# Altium PCB ContadorSincronico_PCB.PcbDoc
Units mm, origin at the board's own origin, x right, y up, seen from the top; angles counter-clockwise.
Board outline 72.01 x 36.47 mm, 2 copper layers (Top Layer, Bottom Layer); 18 components, 11 nets, 74 pads, 11 vias.
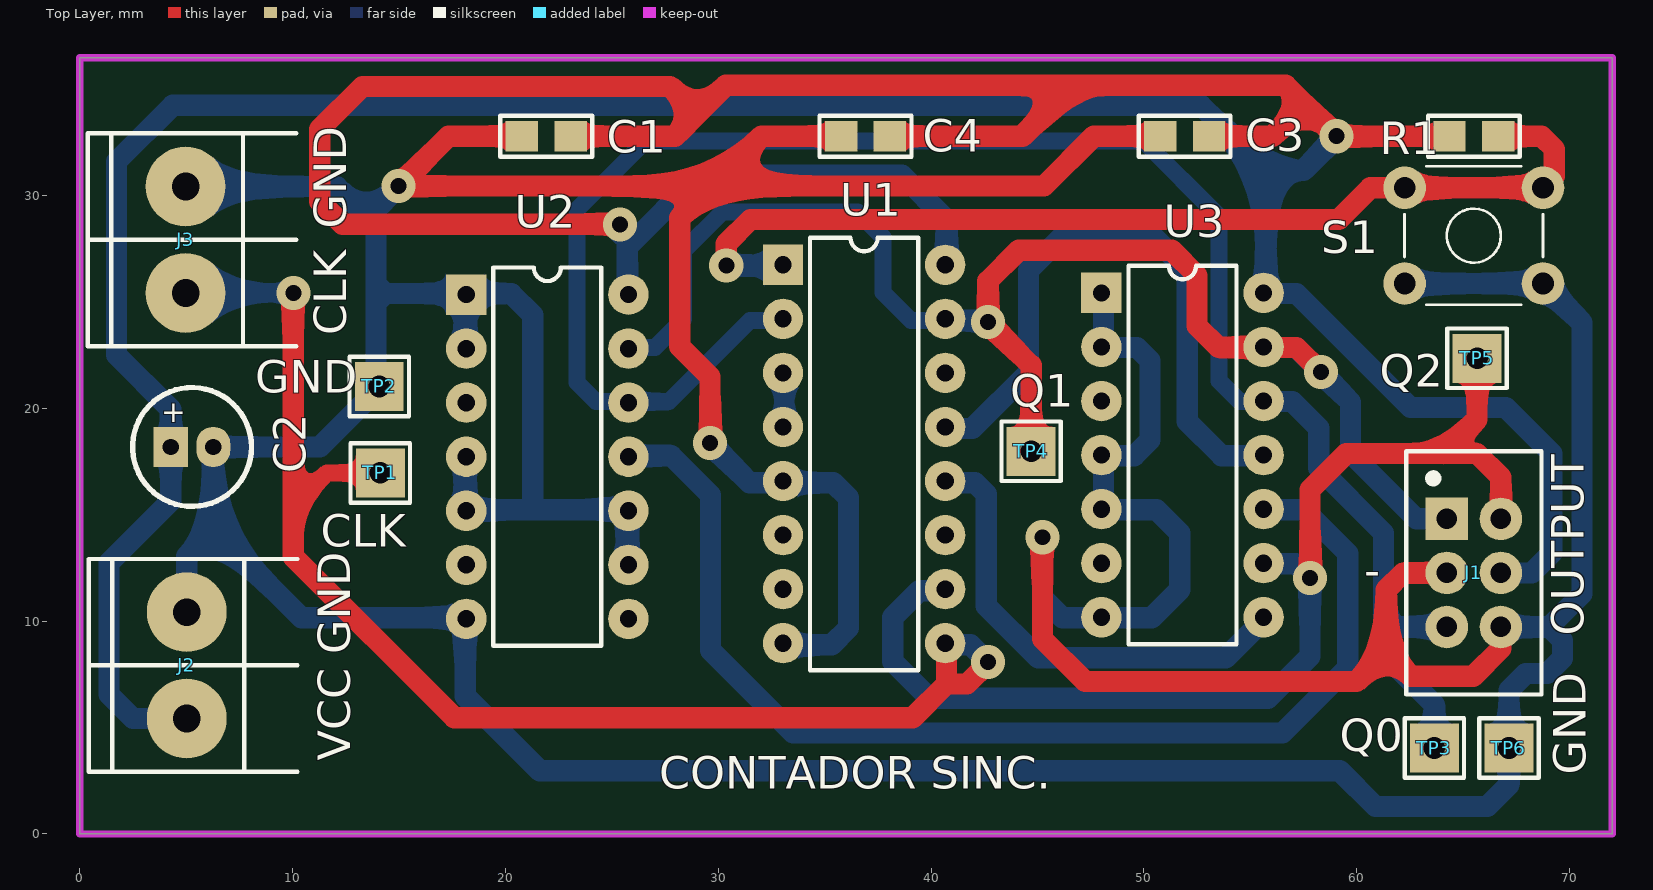
[diagram p0: Top Layer view]
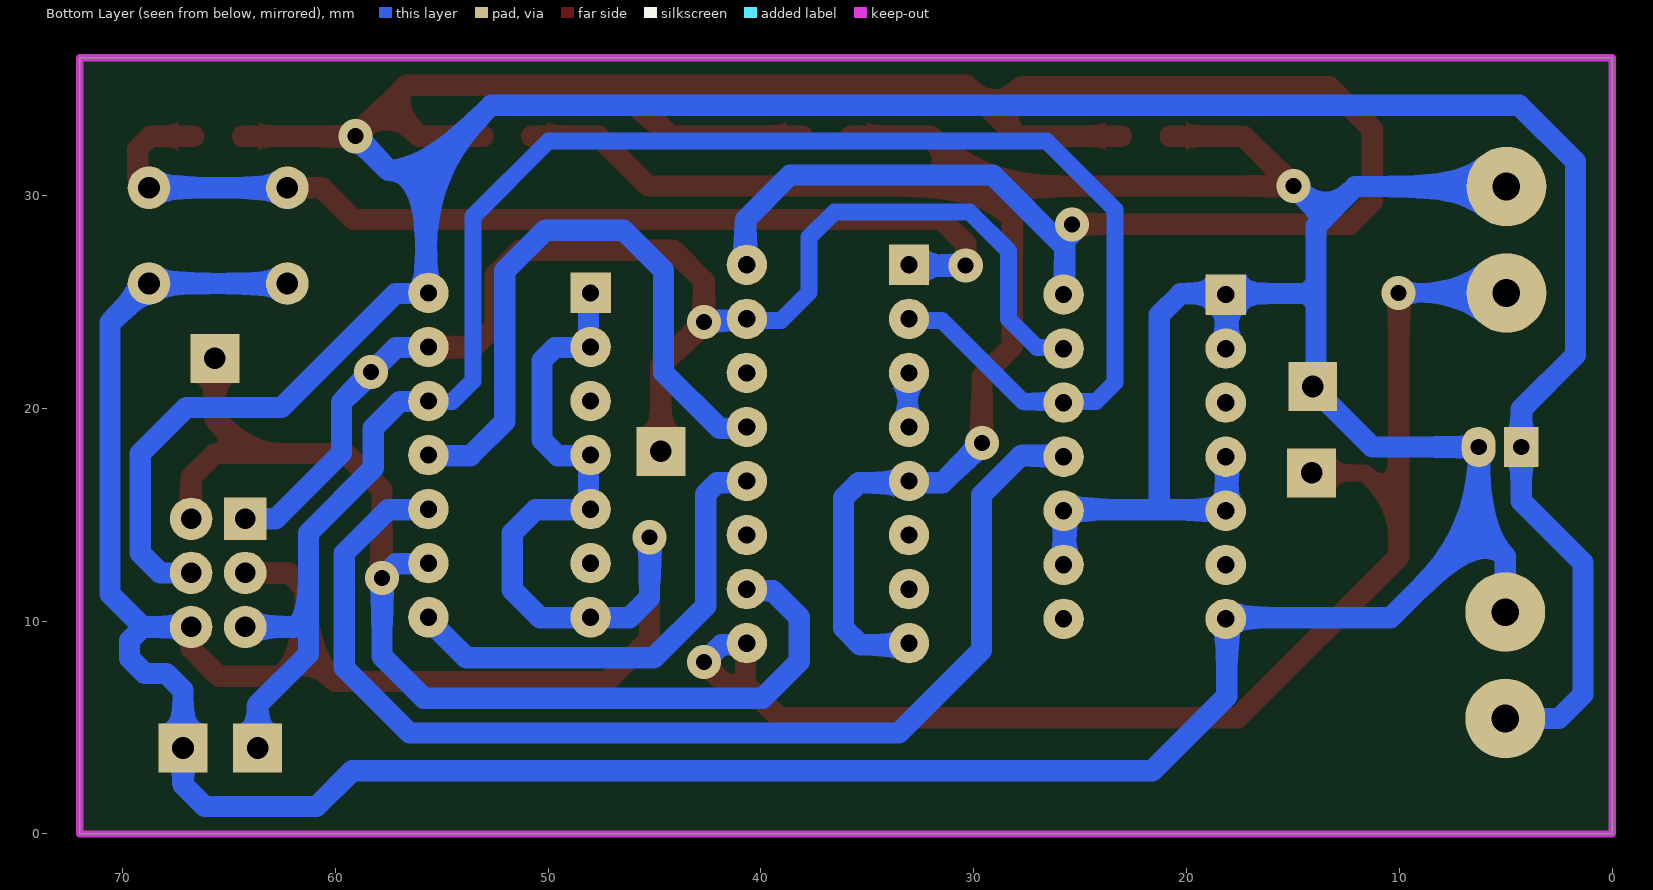
[diagram p1: Bottom Layer view, seen from below]
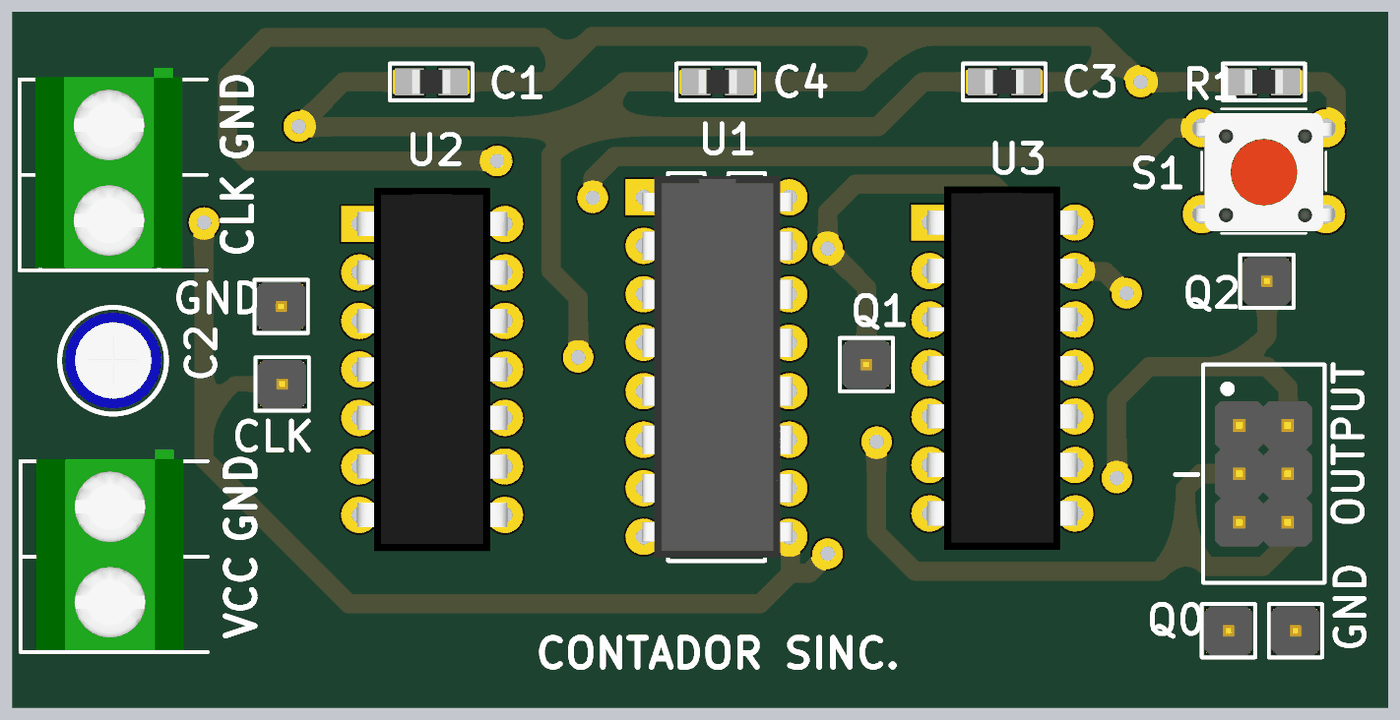
[diagram p2: 3D render of the assembled board from above, using the file's embedded part models]

## Layer stack, top to bottom
Top Solder: solder mask 0.0102, Solder Resist, Dk 3.5
Top Layer: signal copper 0.0356
Dielectric 1: dielectric 0.32, FR-4, Dk 4.8
Bottom Layer: signal copper 0.0356
Bottom Solder: solder mask 0.0102, Solder Resist, Dk 3.5

## Board outline
0,0 72.009,0 72.009,36.474 0,36.474

## Design rules (kind name [scope] priority, off if disabled: settings)
Clearance [All] p1: gap=0.4
PolygonConnect [All] p1: connectstyle=Relief reliefconductorwidth=0.254 reliefentries=4 polygonreliefangle="90 Angle" airgapwidth=0.254
RoutingVias [All] p1: holewidth=0.75 width=1.5 viastyle="Through Hole" minholewidth=0.75 minwidth=1.5 maxholewidth=0.75 maxwidth=1.5
SolderMaskExpansion [All] p1: expansion=0.102
Width PowerSupply [InNetClass('Power')] p1: maxlimit=2 minlimit=0.8 preferedwidth=1
Width [All] p2: maxlimit=1 minlimit=0.7 preferedwidth=0.8
30 further rules are at their usual default settings.

## Classes and differential pairs
net class Power: GND VCC

## Components (designator, comment, footprint, x,y, rotation, side; value= is the part's Value field where it differs from the comment)
C1 "100nF" 0805 21.92,32.791 r180 top
C2 "10uF" CAP100RP 5.274,18.186 r0 top
C3 "100nF" 0805 51.918,32.791 r180 top
C4 "100nF" 0805 36.919,32.791 r180 top
J1 "OUTPUT" SIP3*2 64.237,14.808 r270 top
J2 "SUPPLY" BORNERA2 5.025,7.925 r0 top
J3 "CLOCK" BORNERA2 4.974,27.925 r0 top
R1 "100k" 0805 65.507,32.789 r0 top
S1 "RESET" TACTSWITCH 65.507,28.118 r270 top
TP1 "CLK" TPTH 14.122,16.967 r270 top
TP2 "GND" TPTH 14.072,21.031 r270 top
TP3 "Q0" TPTH 63.652,4.039 r270 top
TP4 "Q1" TPTH 44.704,17.983 r270 top
TP5 "Q2" TPTH 65.659,22.352 r270 top
TP6 "GND" TPTH 67.158,4.039 r270 top
U1 "SN74LS175N" DIP16 33.045,26.746 r0 top
U2 "SN74LS08N" DIP14 18.161,25.349 r0 top
U3 "SN74LS86AN" DIP14 48.006,25.425 r0 top

## Footprints (in the part's own frame and the unit in brackets; to place one, negate y for a bottom-side part, rotate by r counter-clockwise, add the part's x,y. Pads: shape width x height; smd on the part's side, far side on the other; paste and mask are expansions set on the pad)
0805 [mil] "Pasivo 0805"
  rect 60x56 smd: 1(-45,0) 2(45,0)
  silkscreen extent -85,-38 85,38, body extent -40,-25 39,25, height 15
BORNERA2 [mm] "Bornera con Tornillos 5mm separación"
  round 3.75 hole 1.3: 1(0,2.5) 2(0,-2.5)
  silkscreen extent -4.6,-5 5.2,5, body extent -3.76,-4.89 3.94,5.61, height 10
CAP100RP [mm] "Body diameter 5mm"
  rect 1.6x1.9 hole 0.762: 1(-1,0)
  oval 1.6x1.9 hole 0.762: 2(1,0)
  silkscreen extent -2.79,-2.79 2.79,2.79, body extent -2.53,-2.51 2.53,2.54, height 11.53
DIP14 [mm]
  rect 1.9x1.9 hole 0.813: 1(0,0)
  round 1.9 hole 0.813: 2(0,-2.54) 3(0,-5.08) 4(0,-7.62) 5(0,-10.16) 6(0,-12.7) 7(0,-15.24) 8(7.62,-15.24) 9(7.62,-12.7) 10(7.62,-10.16) 11(7.62,-7.62) 12(7.62,-5.08) 13(7.62,-2.54) 14(7.62,0)
  silkscreen extent 1.27,-16.51 6.35,1.27, body extent -0.13,-17.14 7.75,1.9, height 4.19
DIP16 [mm]
  rect 1.9x1.9 hole 0.813: 1(0,0)
  round 1.9 hole 0.813: 2(0,-2.54) 3(0,-5.08) 4(0,-7.62) 5(0,-10.16) 6(0,-12.7) 7(0,-15.24) 8(0,-17.78) 9(7.62,-17.78) 10(7.62,-15.24) 11(7.62,-12.7) 12(7.62,-10.16) 13(7.62,-7.62) 14(7.62,-5.08) 15(7.62,-2.54) 16(7.62,0)
  silkscreen extent 1.27,-19.05 6.35,1.27, body extent -0.08,-18.89 7.79,1.11, height 1.98
SIP3*2 [mm]
  rect 2x2 / inner rect 1.524x1.524 / far side rect 2x2 hole 0.965: 1(0,0)
  round 2 / inner round 1.524 / far side round 2 hole 0.965: 2(0,2.54) 3(2.54,0) 4(2.54,2.54) 5(5.08,0) 6(5.08,2.54)
  silkscreen extent -3.18,-1.91 8.25,4.45, body extent -1.26,-1.3 6.36,3.78, height 10.1
TACTSWITCH [mm]
  round 2 hole 1.016: 1(-2.25,-3.25) 2(-2.25,3.25) 3(2.25,-3.25) 4(2.25,3.25)
  silkscreen extent -3.25,-3.25 3.25,3.25, body extent -3.05,-3.95 3.15,3.95, height 7
TPTH [mm]
  rect 2.3x2.3 hole 1.016: 1(0,0)
  silkscreen extent -1.4,-1.4 1.4,1.4, body extent -1.27,-1.27 1.27,1.27, height 6.04

## Part data
C1 C3 C4: library part CAP
C2: library part CAPPOL
J1: library part CON3*2
J2 J3: library part "BORNERA 2"
R1: library part RES
S1: library part "TACT SWITCH"
TP1 TP2 TP3 TP4 TP5 TP6: library part TP
U1: "Quadruple D-Type Flip-Flop with Clear"
U2: "Quadruple 2-Input Positive-AND Gate"
U3: "Quadruple 2-Input Exclusive-OR Gate"

## Via types
v1: diameter 1.6, hole 0.75, Top Layer to Bottom Layer, 11 vias

## Nets (pads, with @x,y where several pads share a name; then routed paths per layer and width w, separated by ;. In a path a pad name is that pad's centre, name@x,y a point inside that pad or via, vN(x,y) a via of type N, cw(c..) or ccw(c..) an arc to the next point about the centre after c; other vN are vias at no path point)
CLK: J3.2 TP1.1 U1.9 | length 63.2
  Top Layer w0.8: 10.033,15.392 11.608,16.967 TP1.1
  Top Layer w1: v1(10.033,25.425) 10.033,15.392 10.033,13.03 17.602,5.461 39.141,5.461 40.729,7.048 ; U1.9@40.729,8.89 40.729,7.048 ; v1(42.672,8.077) 42.672,8.026 41.694,7.048 40.729,7.048
  Bottom Layer w0.8: J3.2 v1(10.033,25.425)
  Bottom Layer w1: U1.9@40.729,8.89 41.859,8.89 v1(42.672,8.077)
GND: C1.2 C2.2 C3.2 C4.2 J1.3 J1.6 J2.1 J3.1 S1.3 S1.4 TP2.1 TP6.1 U1.5 U1.8 U2.1 U2.2 U2.4 U2.5 U2.7 U2.9 U2.10 U3.1 U3.2 U3.4 U3.5 U3.7 | length 321.4
  Top Layer w1: C1.2 17.323,32.791 v1(14.986,30.455) 29.693,30.455 ; v1(29.616,18.364) 29.616,21.488 28.194,22.911 28.194,28.956 29.693,30.455 ; C4.2 32.029,32.791 29.693,30.455 ; v1(45.237,13.945) 45.237,9.169 47.244,7.163 59.995,7.163 61.392,8.56 ; C3.2 47.65,32.791 45.314,30.455 29.693,30.455 ; J1.3 62.179,12.268 61.392,11.481 61.392,8.56 ; J1.6 66.777,8.712 65.481,7.417 62.535,7.417 61.392,8.56
  Bottom Layer w1: J3.1 12.069,30.425 13.513,28.981 ; J2.1 5.025,13.051 6.274,14.3 ; v1(14.986,30.455) 13.513,28.981 ; U2.4@18.11,17.78 18.11,15.24 21.26,15.24 ; U2.2@18.11,22.86 U2.1@18.11,25.4 ; U2.9@25.73,12.7 25.73,15.24 21.26,15.24 ; v1(29.616,18.364) 31.471,16.51 35.408,16.51 36.119,15.799 36.119,9.677 35.331,8.89 U1.8@33.109,8.89 ; v1(45.237,13.945) 45.237,11.1 46.177,10.16 50.368,10.16 51.689,11.481 51.689,14.148 50.597,15.24 48.108,15.24 48.108,17.78 49.555,17.78 50.292,18.517 50.292,22.25 49.682,22.86 48.108,22.86 U3.1@48.108,25.4 ; S1.3 S1.4 70.587,24.038 70.587,11.278 69.037,9.728 ; J1.6 69.037,9.728 ; 6.274,14.3 C2.2 11.278,18.186 13.919,20.828 13.919,24.968 ; 6.274,14.3 10.414,10.16 18.11,10.16 18.11,6.477 21.615,2.972 59.207,2.972 60.884,1.295 66.142,1.295 67.158,2.311 TP6.1 67.158,6.756 67.945,7.544 68.961,7.544 69.672,8.255 69.672,9.093 69.037,9.728 ; 13.513,28.981 13.919,28.575 13.919,25.832 ; 13.919,24.968 14.351,25.4 ; 13.919,24.968 13.919,25.832 ; 13.919,25.832 14.351,25.4 ; 14.351,25.4 U2.1@18.11,25.4 ; U2.1@18.11,25.4 20.269,25.4 21.285,24.384 21.285,15.265 21.26,15.24
NetU1_3: U1.3 U1.4 | length 2.5
  Bottom Layer w0.8: U1.4@33.109,19.05 U1.3@33.109,21.59
NetU1_12: U1.12 U3.8 | length 22.3
  Bottom Layer w1: U1.12@40.729,16.51 42.062,16.51 42.596,15.977 42.596,10.719 45.034,8.28 53.848,8.28 U3.8@55.728,10.16
NetU1_13: U1.13 U3.11 | length 30.2
  Bottom Layer w1: U1.13@40.729,19.05 41.935,19.05 44.577,21.692 44.577,26.492 46.457,28.372 50.14,28.372 52.045,26.467 52.045,19.38 53.645,17.78 U3.11@55.728,17.78
NetU2_11: U2.11 U3.10 | length 54.9
  Bottom Layer w1: U2.11@25.73,17.78 27.788,17.78 29.642,15.926 29.642,8.636 33.528,4.75 56.515,4.75 59.588,7.823 59.588,13.183 57.531,15.24 U3.10@55.728,15.24
Q0: J1.5 TP3.1 U1.2 U2.12 U3.12 | length 86.6
  Bottom Layer w0.8: U1.2@33.109,24.13 31.496,24.13 27.686,20.32 24.257,20.32 23.367,21.21 23.367,29.344 26.586,32.563 49.987,32.563 53.543,29.007 53.543,21.285 54.508,20.32 U3.12@55.982,20.32
  Bottom Layer w1: U3.12@55.982,20.32 56.972,20.32 58.217,19.075 58.217,17.196 61.265,14.148 61.265,10.312 ; TP3.1 63.652,6.071 61.265,8.458 61.265,10.312 ; J1.5 61.849,9.728 61.265,10.312
Q1: J1.1 TP4.1 U1.15 U2.13 U3.13 | length 67.3
  Top Layer w1: TP4.1 44.704,22.022 v1(42.672,24.054) 42.672,25.984 44.12,27.432 51.308,27.432 52.502,26.238 52.502,23.876 53.518,22.86 57.175,22.86 v1(58.318,21.717)
  Bottom Layer w0.8: U2.13@25.73,22.86 27.026,22.86 28.372,24.206 28.372,27.407 30.201,29.235 36.551,29.235 37.744,28.042 37.744,25.451 39.065,24.13 U1.15@40.729,24.13
  Bottom Layer w1: U1.15@40.729,24.13 42.596,24.13 v1(42.672,24.054) ; U3.13@55.728,22.86 57.15,22.86 59.715,20.295 59.715,17.907 62.814,14.808 J1.1 ; v1(58.318,21.717) v1@58.42,21.717
Q2: J1.2 TP5.1 U1.10 U3.9 | length 53.7
  Top Layer w1: v1(57.81,12.04) 57.81,16.18 59.512,17.882 64.059,17.882 ; TP5.1 65.659,19.482 64.059,17.882 ; J1.2 66.777,16.764 65.659,17.882 64.059,17.882
  Bottom Layer w1: U1.10@40.729,11.43 39.446,11.43 38.202,10.185 38.202,8.103 39.927,6.377 55.831,6.377 57.81,8.357 v1(57.81,12.04) 57.15,12.7 U3.9@55.728,12.7
RESET: R1.2 S1.1 S1.2 U1.1 | length 54.7
  Top Layer w1: v1(30.378,26.721) 30.378,27.737 31.521,28.88 59.157,28.88 60.645,30.368 S1.1 S1.2 69.291,30.902 69.291,32.182 68.684,32.789 R1.2
  Bottom Layer w1: v1(30.378,26.721) 33.007,26.721 33.033,26.746 U1.1@33.109,26.67 ; S1.1 S1.2
VCC: C1.1 C2.1 C3.1 C4.1 J1.4 J2.2 R1.1 U1.16 U2.14 U3.14 | length 239.5
  Top Layer w1: C1.1 27.965,32.791 29.019,33.846 ; v1(25.375,28.651) 12.344,28.651 11.278,29.718 11.278,33.122 13.284,35.128 27.737,35.128 29.019,33.846 ; C4.1 44.298,32.791 46.685,35.179 ; C3.1 56.058,32.791 57.556,34.29 ; R1.1 v1(59.058,32.789) 57.556,34.29 ; 29.019,33.846 30.353,35.179 46.685,35.179 ; 46.685,35.179 56.667,35.179 57.556,34.29
  Bottom Layer w1: J2.2 2.5,5.425 1.372,6.553 1.372,12.751 4.274,15.653 C2.1 4.274,19.958 1.727,22.504 1.727,31.598 4.369,34.239 52.68,34.239 55.728,31.191 ; v1(25.375,28.651) 25.375,28.245 25.73,27.889 25.73,27.584 ; U2.14@25.73,25.4 25.73,27.584 ; U1.16@40.729,26.67 40.729,28.867 38.633,30.963 29.108,30.963 25.73,27.584 ; v1@59.106,32.766 59.08,32.766 57.506,31.191 55.728,31.191 ; J1.4 68.224,12.268 69.164,13.208 69.164,17.882 67.005,20.041 62.535,20.041 57.175,25.4 55.728,25.4 55.728,31.191
pads on no net: U1.6 U1.7 U1.11 U1.14 U2.3 U2.6 U2.8 U3.3 U3.6

## Keep-outs
Keep-Out Layer:
  the board outline again, w0.35

## Silkscreen, mask and mechanical layers (free items; w line width, h text height)
Top Overlay:
  text "GND" at 12.522,28.448 h1.52 r90
  text "CLK" at 12.522,23.448 h1.52 r90
  text "-" at 60.35,11.633 h1.52
  text "GND" at 12.7,8.447 h1.52 r90
  text "VCC" at 12.7,3.447 h1.52 r90
  text "CONTADOR SINC." at 27.229,2.134 h1.52

## Text inside footprints (layer, text, board x,y; h text height)
C2: Top Overlay "+" at 3.826,19.355 h1.02